# Allegro board ESP32_LED2.brd
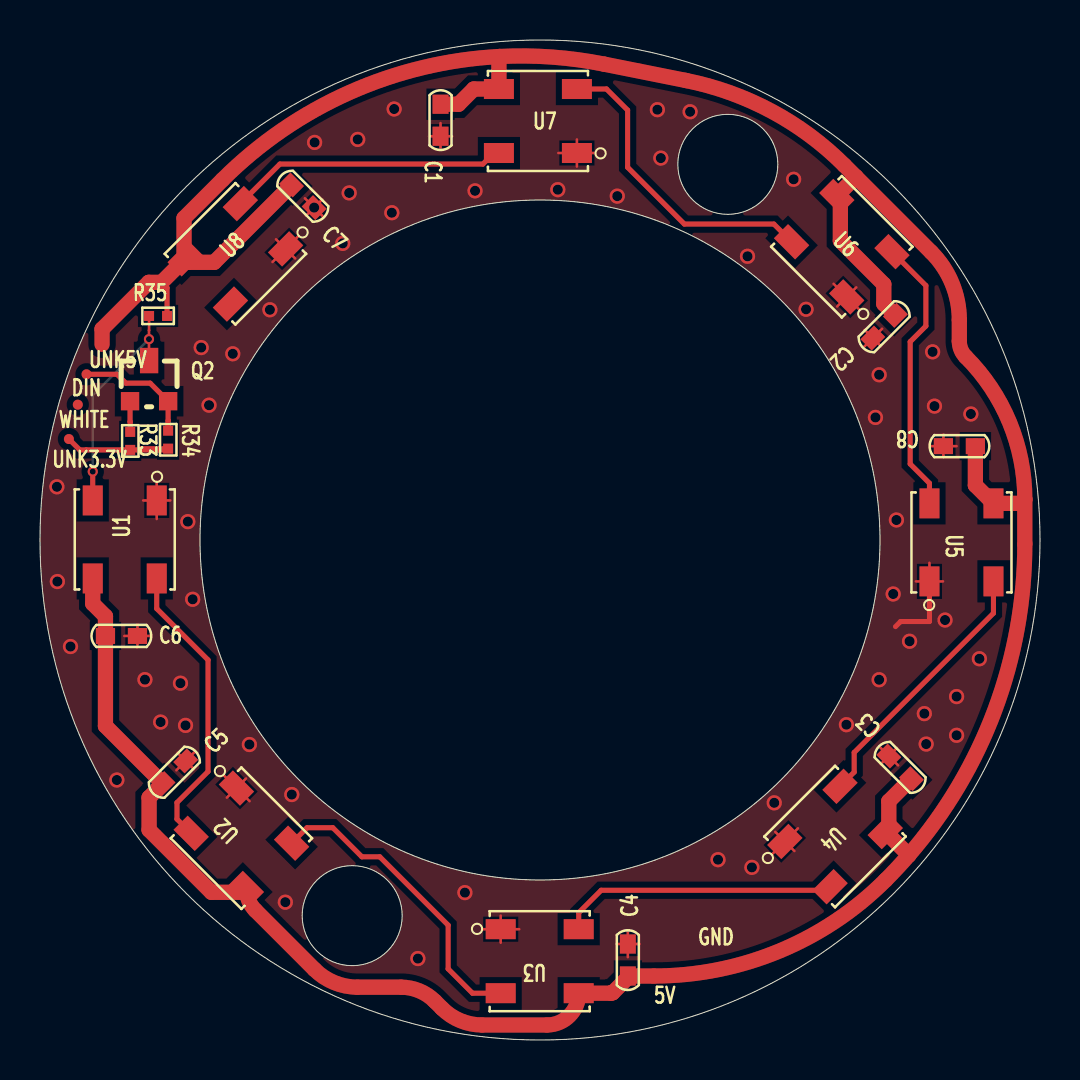
[diagram p0: board, top side]
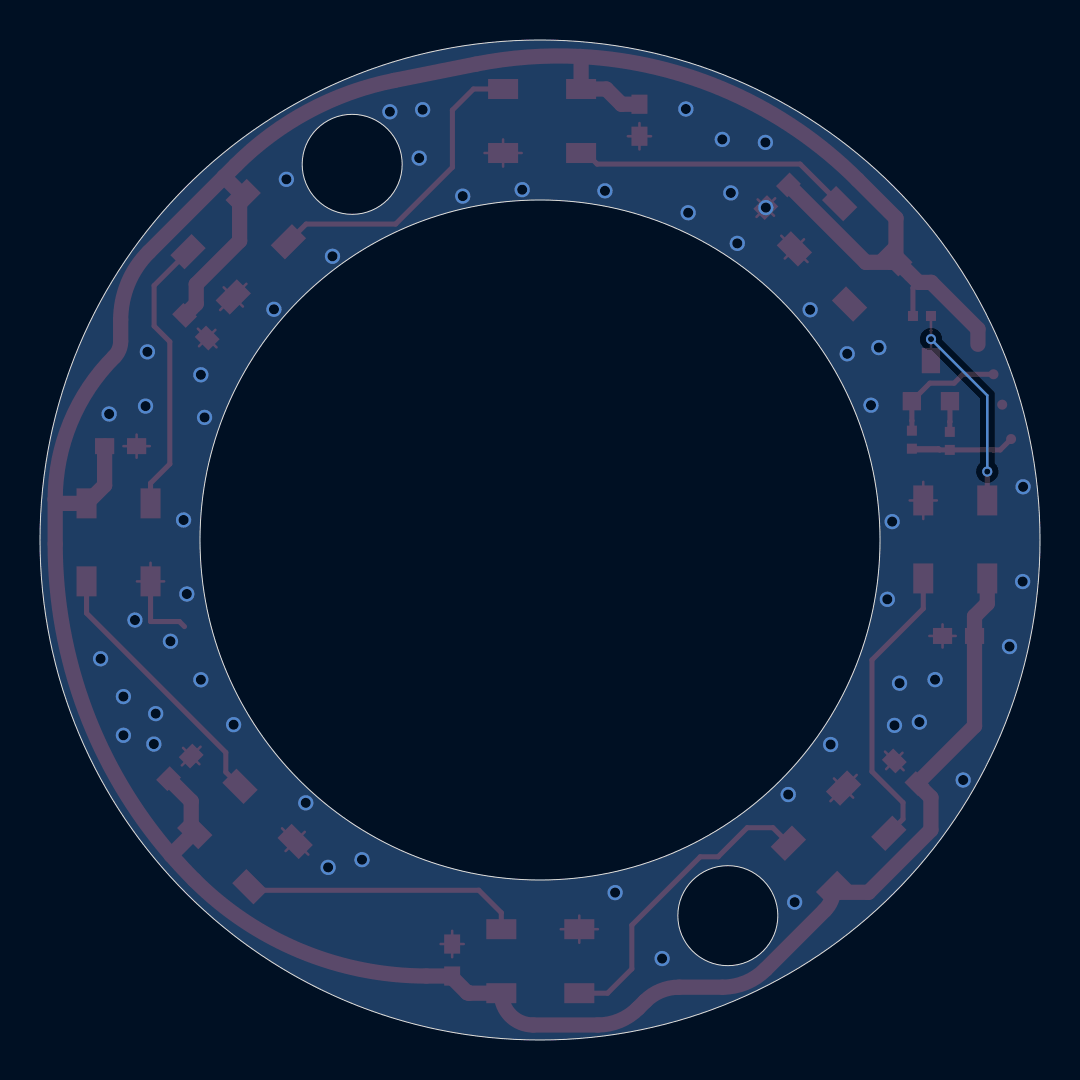
[diagram p1: board, bottom side, seen from below]

Outline 50 x 50 mm; copper layers: TOP, BOTTOM. Coordinates in mm from the lower left corner of the outline.
Outline path: circle c15.61,6.22 r2.5 ; circle c25,25 r17 ; circle c25,25 r25 ; circle c34.39,43.78 r2.5

## Design rules (mm)
net group DIN: nets DIN VCC5V
net group IO21: nets IO21 N16943030 VCC_3.3V

## Placement (name value [footprint] x y rotation side)
C1  0.1uF/16V  [C0603]  20.03 46.79 270 top
C2  0.1uF/16V  [C0603]  42.77 36.23 225 top
C3  0.1uF/16V  [C0603]  43.57 13.07 135 top
C4  0.1uF/16V  [C0603]  29.39 3.2 90 top
C5  0.1uF/16V  [C0603]  6.15 12.82 45 top
C6  0.1uF/16V  [C0603]  3.27 20.2 0 top
C7  0.1uF/16V  [C0603]  12.58 42.75 315 top
C8  0.1uF/16V  [C0603]  46.77 29.69 180 top
DIN  Red  [TP1]  2.33 33.29 0 top
Q2  SI2306  [SOT23]  5.46 32.93 0 top
R33  2K  [R0402]  4.51 30.4 270 top
R34  10K(1%)  [R0402]  6.4 30.47 270 top
R35  10K(1%)  [R0402]  5.45 36.2 0 top
U1  N302B-5050  [LED_5050]  2.64 23.08 90 top
U2  N302B-5050  [LED_5050]  10.32 7.58 135 top
U3  N302B-5050  [LED_5050]  26.93 2.34 180 top
U4  N302B-5050  [LED_5050]  42.26 10.42 225 top
U5  N302B-5050  [LED_5050]  47.67 26.83 270 top
U6  N302B-5050  [LED_5050]  39.84 42.17 315 top
U7  N302B-5050  [LED_5050]  22.95 47.55 0 top
U8  N302B-5050  [LED_5050]  7.26 39.06 45 top
UNK3.3V  Red  [TP1]  1.45 30.05 0 top
UNK5V  Red  [TP1]  3.1 34.79 0 top
WHITE  Red  [TP1]  1.89 31.77 0 top

## Library data of the parts
C1-C8 = CAP NP
DIN UNK3.3V UNK5V WHITE = TEST POINT_0
Q2 = MOSFET P_1
R33-R35 = RESISTOR_0: signal model: DEFAULT_RESISTOR_200OHM_1_2
U1-U8 = N302B-5050RGB

## Footprints (pads in the part's own frame, mm; a bottom-side part is the same pattern mirrored in y, then rotated)
C0603
  rect 0.96x0.8 smd: 1(0,0) 2(1.6,0)
LED_5050
  rect 1.5x1 smd: 1(0,0) 2(3.9,0) 3(3.9,-3.2) 4(0,-3.2)
R0402
  rect 0.5x0.5 smd: 1(0,0) 2(0.9,0)
SOT23
  rect 0.914x0.914 smd: 1(-0.953,-0.991) 2(0.953,-0.991)
  rect 0.914x1.27 smd: 3(0,1.041)
TP1
  round 0.5 smd: 1(0,0)

## Nets
GND: C1.2 C2.2 C3.2 C4.2 C5.2 C6.2 C7.2 C8.2 U1.3(GND) U2.3(GND) U3.3(GND) U4.3(GND) U5.3(GND) U6.3(GND) U7.3(GND) U8.3(GND)
VCC5V: C1.1 C2.1 C3.1 C4.1 C5.1 C6.1 C7.1 C8.1 R35.2 U1.1(VCC) U2.1(VCC) U3.1(VCC) U4.1(VCC) U5.1(VCC) U6.1(VCC) U7.1(VCC) U8.1(VCC) UNK5V.1
VCC_3.3V: R33.2 R34.2 UNK3.3V.1
DIN: Q2.3(SOURCE) R35.1 U1.2(DIN)
IO21: DIN.1 Q2.2(DRAIN) R34.1
IO22: WHITE.1
N16943030: Q2.1(GATE) R33.1
N16944159: U1.4(DOUT) U2.2(DIN)
N16944331: U2.4(DOUT) U3.2(DIN)
N16944558: U3.4(DOUT) U4.2(DIN)
N16944602: U4.4(DOUT) U5.2(DIN)
N16944818: U5.4(DOUT) U6.2(DIN)
N16944862: U6.4(DOUT) U7.2(DIN)
N16944902: U7.4(DOUT) U8.2(DIN)

Pads without a net: U8 4

## Via types
v1: diameter 0.508, hole 0.305, TOP to BOTTOM, 2 vias
v2: diameter 0.762, hole 0.508, TOP to BOTTOM, 54 vias

## Routing (per net, layer and track width the routed paths; a pad name or vN(x,y) marks a point on that pad's centre or on a via; arc(x,y) is an arc through that point)
GND: length 48.3
  TOP w0.127: 39.68,37.81 U6.3 ; U6.3 40.82,37.63 ; U6.3 39.86,36.67 ; U6.3 40.99,36.5 ; U4.3 37.9,10.58 ; U4.3 36.59,9.27 ; U4.3 36.76,10.41 ; U4.3 37.72,9.45 ; v2(13.71,41.62) 14.17,41.16 ; v2(13.71,41.62) 13.24,42.09 ; v2(13.71,41.62) 13.3,41.21 ; v2(13.71,41.62) 14.12,42.03 ; U7.3 27.77,44.35 ; U7.3 26.85,45.03 ; U7.3 26.85,43.67 ; U7.3 25.92,44.35 ; 41.17,34.63 C2.2 ; C2.2 41.23,35.51 ; C2.2 42.05,34.69 ; C2.2 42.11,35.56 ; C4.2 29.39,5.46 ; C4.2 29.97,4.8 ; C4.2 28.81,4.8 ; C4.2 29.39,4.14 ; C6.2 5.53,20.2 ; C6.2 4.87,20.78 ; C6.2 4.21,20.2 ; C6.2 4.87,19.62 ; U5.3 44.47,23.86 ; U5.3 45.15,22.93 ; U5.3 43.8,22.93 ; 5.84,26.05 U1.3 ; U1.3 6.51,26.98 ; U1.3 5.84,27.91 ; U1.3 5.16,26.98 ; U3.3 23.96,5.54 ; U3.3 23.04,4.86 ; U3.3 22.11,5.54 ; U3.3 23.04,6.22 ; C5.2 7.75,14.42 ; C5.2 6.88,14.36 ; C5.2 6.82,13.49 ; C5.2 7.69,13.54 ; 19.45,45.19 C1.2 ; C1.2 20.03,44.53 ; C1.2 20.03,45.85 ; C1.2 20.6,45.19 ; U2.3 10.3,13.08 ; U2.3 9.34,12.12 ; U2.3 9.17,13.25 ; U2.3 10.48,11.94 ; C8.2 45.17,30.27 ; C8.2 45.17,29.12 ; C8.2 45.83,29.69 ; C8.2 44.51,29.69 ; 12.94,40.21 12.46,39.73 ; C3.2 42.85,14.61 ; C3.2 41.97,14.66 ; C3.2 42.9,13.73 ; C3.2 42.03,13.79 ; 11.62,38.9 U8.3 ; U8.3 11.8,40.03 ; U8.3 12.76,39.08
  TOP w0.254: U5.3 44.47,20.92 43.03,20.92 42.78,20.67 ; 12.46,39.73 U8.3
  vias: v2(0.84,27.66) v2(0.87,22.92) v2(1.52,19.67) v2(3.84,13) v2(5.25,18.02) v2(6.03,15.9) v2(7.02,17.84) v2(7.28,15.73) v2(7.39,25.92) v2(7.63,22.04) v2(8.06,34.62) v2(8.45,31.74) v2(9.64,34.31) v2(10.47,14.77) v2(11.49,36.51) v2(12.27,6.89) v2(12.59,12.27) v2(13.73,44.88) v2(15.14,39.83) v2(15.46,42.35) v2(15.89,45.03) v2(17.59,41.36) v2(17.71,46.55) v2(18.89,4.07) v2(21.25,7.37) v2(21.75,42.46) v2(25.89,42.52) v2(28.86,42.19) v2(30.87,46.52) v2(31.04,44.1) v2(32.51,46.41) v2(33.9,9.02) v2(35.38,39.19) v2(35.59,8.63) v2(36.71,11.86) v2(37.68,43.03) v2(38.3,36.53) v2(40.32,15.77) v2(41.77,31.13) v2(41.96,33.26) v2(41.96,18.01) v2(42.66,22.3) v2(42.82,26) v2(43.48,19.94) v2(44.22,16.32) v2(44.31,14.8) v2(44.63,34.41) v2(44.72,31.69) v2(45.25,21) v2(45.83,17.17) v2(45.83,15.24) v2(46.54,31.3) v2(46.97,19.06)
VCC5V: length 175.7
  TOP w0.254: 6.08,37.88 6.35,37.61 R35.2
  TOP w0.762: 40.79,43.16 44.56,39.39 arc(45.6,37.84) 45.97,36 45.97,34.94 arc(46.05,34.52) 46.29,34.16 arc(48.47,30.89) 49.24,27.03 ; 40.79,43.16 39.84,42.21 U6.1 40.02,42 40.02,39.96 42.19,37.79 42.19,36.81 C2.1 ; 40.79,43.16 40.21,43.74 arc(36.57,46.44) 32.3,47.97 28.21,48.79 arc(25.61,49.15) 22.98,49.17 ; 49.24,27.03 49.24,24.8 arc(47.74,16.5) 43.44,9.25 ; 49.24,27.03 49.04,26.83 U5.1 46.77,27.74 C8.1 ; U8.1 7.2,39.12 7.2,41.09 9.12,43.01 arc(15.48,47.38) 22.98,49.17 ; U8.1 6.08,37.88 5.44,37.88 3.1,35.55 UNK5V.1 ; U8.1 7.44,38.88 8.71,38.88 C7.1 ; 22.98,49.17 22.95,49.14 U7.1 21.69,47.55 20.93,46.79 C1.1 ; 43.44,9.25 42.26,10.42 U4.1 42.44,10.6 42.44,11.93 C3.1 ; 43.44,9.25 arc(42.87,8.61) 42.28,8 arc(36.96,4.45) 30.69,3.2 C4.1 29.39,3.12 28.63,2.36 28.55,2.36 28.53,2.34 U3.1 arc(26.47,1.22) 25.35,0.75 22.11,0.75 arc(21.02,0.97) 20.1,1.58 19.74,1.94 arc(18.97,2.46) 18.05,2.64 15.87,2.64 arc(14.71,2.87) 13.72,3.53 10.77,6.48 arc(10.43,6.99) U2.1 10.12,7.38 8.57,7.38 5.45,10.5 5.45,12.12 C5.1 3.27,15.7 C6.1 3.27,21.18 2.64,21.82 U1.1
VCC_3.3V: length 6.6
  TOP w0.254: R34.2 5.08,29.57 5.01,29.5 ; 5.01,29.5 6.26,29.5 6.35,29.6 ; 5.01,29.5 R33.2 2.31,29.5 2.3,29.5 1.99,29.5 UNK3.3V.1
DIN: length 11.5
  TOP w0.127: R35.1 5.45,35.49 5.45,35.49 v1(5.45,35.04) 5.45,33.98 Q2.3
  TOP w0.254: U1.2 v1(2.64,28.42)
  BOTTOM w0.127: v1(2.64,28.42) 2.64,32.23 v1(5.45,35.04)
IO21: length 6.1
  TOP w0.254: DIN.1 3.85,33.29 4.29,32.84 5.51,32.84 Q2.2 6.41,30.97 6.4,30.97 R34.1
N16943030: length 1.5
  TOP w0.254: R33.1 4.51,30.91 4.5,30.92 Q2.1
N16944159: length 14.7
  TOP w0.254: U1.4 5.84,21.57 8.4,19 8.4,13.42 6.85,11.87 6.85,11.04 U2.2
N16944331: length 15.5
  TOP w0.254: U2.4 13.35,10.61 14.64,10.61 16.09,9.16 16.99,9.16 20.41,5.74 20.41,3.56 21.62,2.34 U3.2
N16944558: length 13.9
  TOP w0.254: U4.2 39.33,7.49 28.06,7.49 26.93,6.36 U3.4
N16944602: length 13.4
  TOP w0.254: U5.2 47.67,21.34 40.71,14.38 40.71,13.39 U4.4
N16944818: length 14
  TOP w0.254: U5.4 44.47,27.84 43.51,28.8 43.51,34.91 44.29,35.7 44.29,37.72 U6.2
N16944862: length 15.6
  TOP w0.254: U7.2 28.33,47.55 29.38,46.49 29.38,43.63 32.22,40.8 36.69,40.8 U6.4
N16944902: length 14
  TOP w0.254: U8.2 11.99,43.8 22.14,43.8 22.7,44.35 U7.4

## Copper pours and planes (outline as drawn; the poured copper is in the pictures)
GND on TOP: 25,0 25,50 ; 11 cut-outs
GND on BOTTOM: 0,25 50,25

## Text on the board
Ref Des/Silkscreen Top: 5V | GND
NCLEGEND-1-2: FIGURE | SIZE | 12.0 | 20.0 | DRILL CHART: TOP to BOTTOM | ALL UNITS ARE IN MILS | PLATED | QTY | 2 | 54
